# Altium PCB Proximity Sensor.PcbDoc
Units mil, origin at the board's own origin, x right, y up, seen from the top; angles counter-clockwise.
Board outline 1926.34 x 1473.4 mil, 2 copper layers (Top Layer, Bottom Layer); 26 components, 0 nets, 72 pads, 27 vias.
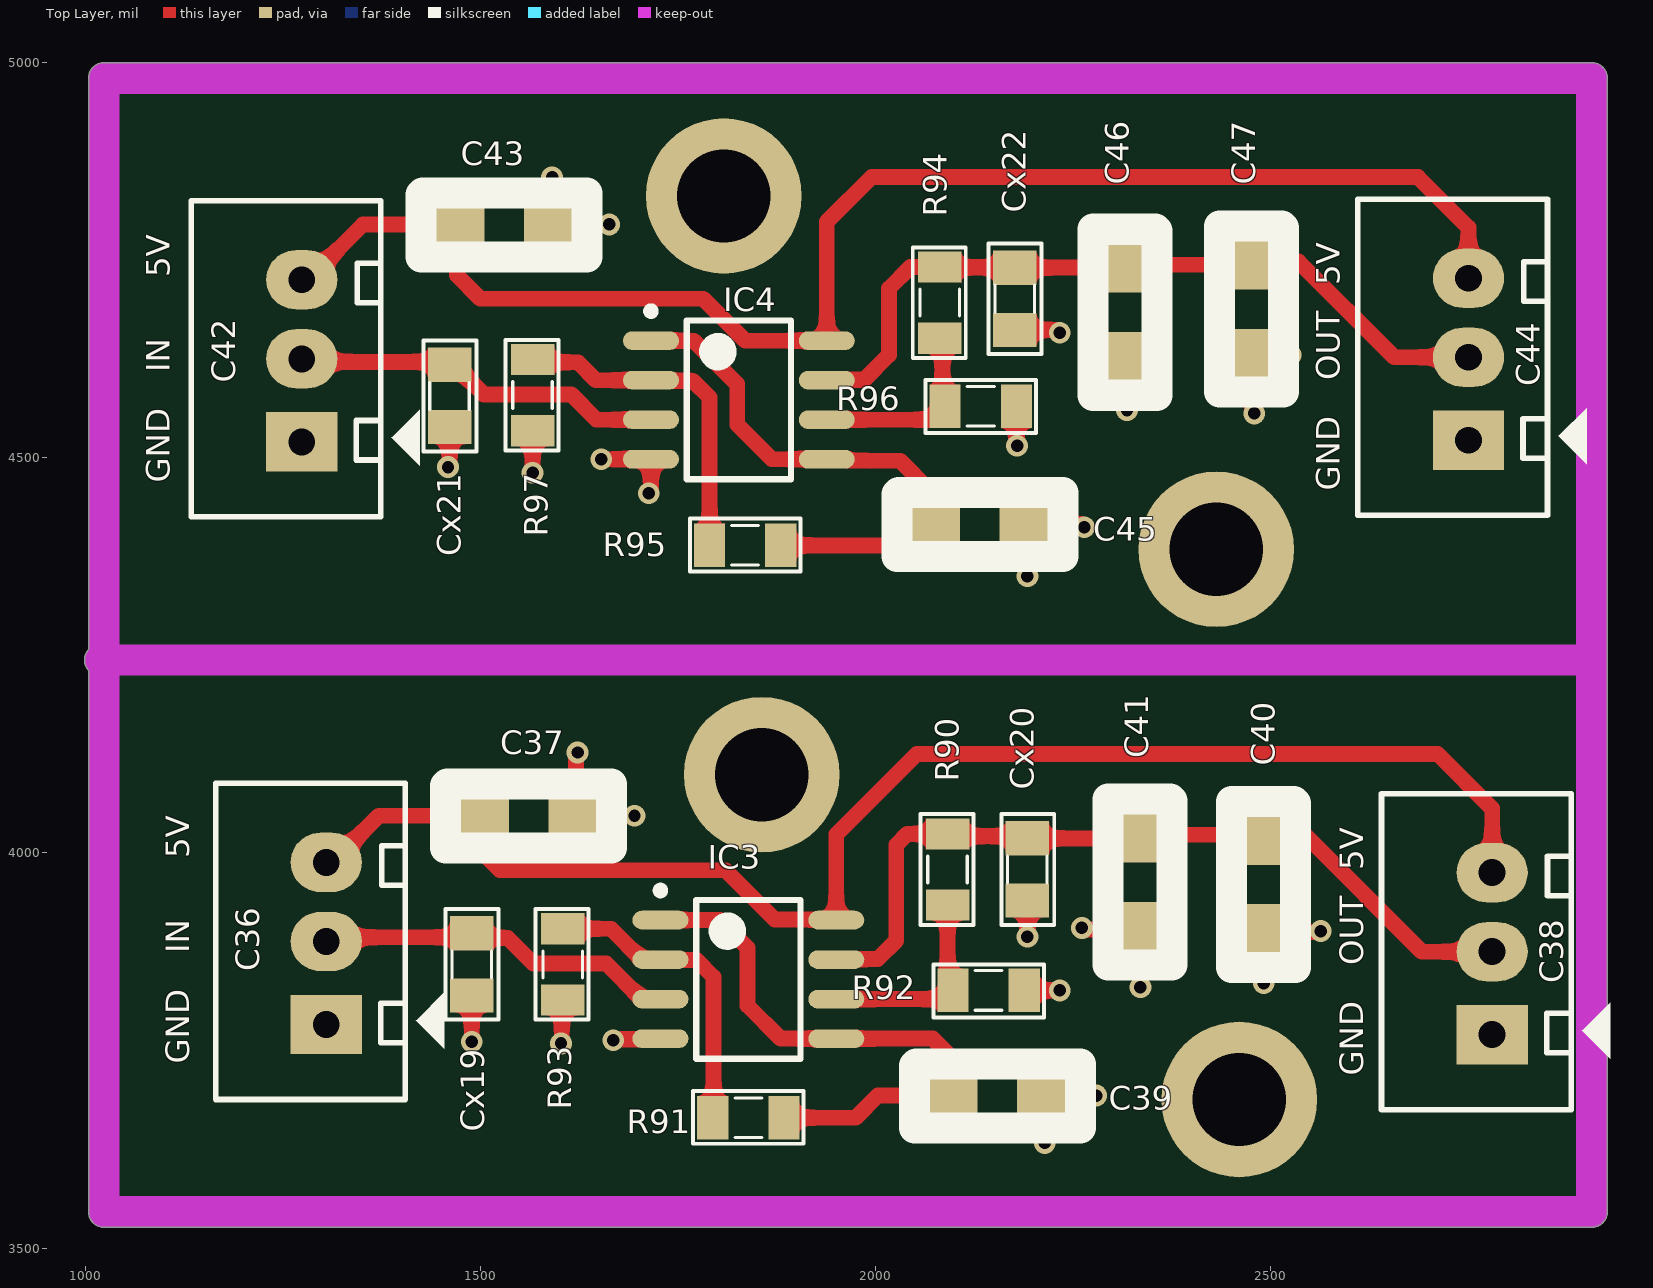
[diagram p0: Top Layer view]
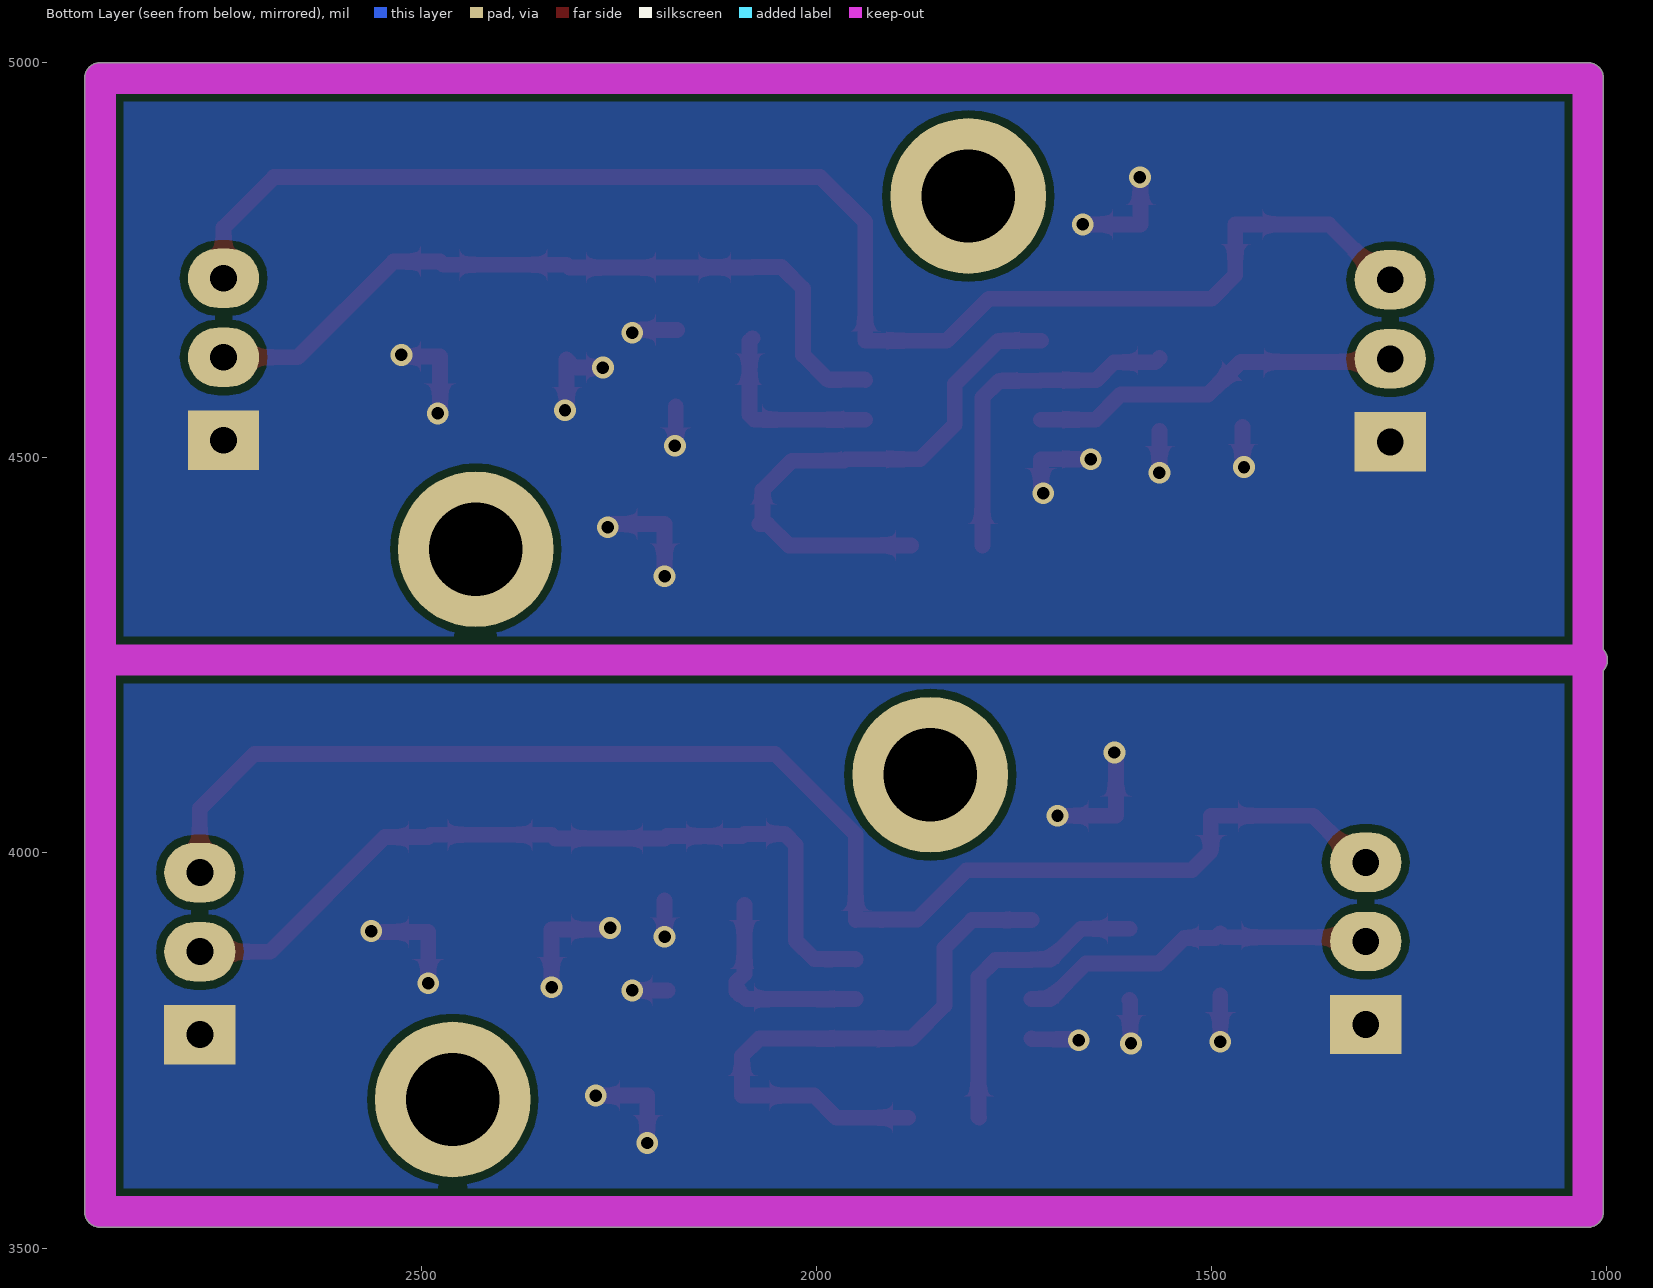
[diagram p1: Bottom Layer view, seen from below]

## Layer stack, top to bottom
Top Solder: solder mask 0.4, Solder Resist, Dk 3.5
Top Layer: signal copper 1.4
Dielectric 1: dielectric 12.6, FR-4, Dk 4.8
Bottom Layer: signal copper 1.4
Bottom Solder: solder mask 0.4, Solder Resist, Dk 3.5

## Board outline
1004.3,3546 1004.3,4230.89 cw(c1019,4244) 1004.3,4257.11 1004.3,4980 cw(c1024,4980) 1024,4999.7 2906,4999.7 cw(c2906,4980) 2925.7,4980 2925.7,3546 cw(c2906,3546) 2906,3526.3 1024,3526.3 cw(c1024,3546)

## Design rules (kind name [scope] priority, off if disabled: settings)
Clearance [All] p1: gap=10 ignorepadtopadclearanceinfootprint=FALSE
PlaneConnect [All] p1: planeconnectstyle=Direct reliefexpansion=20 reliefentries=4 reliefconductorwidth=10 reliefairgap=10
PolygonConnect [All] p1: connectstyle=Direct reliefconductorwidth=10 reliefentries=4 polygonreliefangle="90 Angle" airgapwidth=10
RoutingVias [All] p1: holewidth=15.75 width=27.56 viastyle="Through Hole" minholewidth=15.75 minwidth=27.56 maxholewidth=15.75 maxwidth=27.56
SolderMaskExpansion [All] p1: expansion=4 istentingtop=FALSE
Width [All] p1: maxlimit=30 minlimit=10 preferedwidth=20
29 further rules are at their usual default settings.

## Components (designator, comment, footprint, x,y, rotation, side; value= is the part's Value field where it differs from the comment)
C36 "Header3" Header3 1305,3788 r90 top
C37 "10uF/16V" TANTALUM-3216 1501,4047 r0 top
C38 "Header3" Header3 2780,3775 r90 top
C39 "10uF/16V" TANTALUM-3216 2094,3693 r0 top
C40 "10uF/16V" TANTALUM-3216 2491,4020 r270 top
C41 "10uF/16V" TANTALUM-3216 2335,4023 r270 top
C42 "Header3" Header3 1274,4525 r90 top
C43 "10uF/16V" TANTALUM-3216 1470,4795 r0 top
C44 "Header3" Header3 2750,4527 r90 top
C45 "10uF/16V" TANTALUM-3216 2072,4416 r0 top
C46 "10uF/16V" TANTALUM-3216 2316,4744 r270 top
C47 "10uF/16V" TANTALUM-3216 2476,4748 r270 top
Cx19 "104" CN-SMD-0805 1489,3859 r90 top value=33pF
Cx20 "104" CN-SMD-0805 2192,3979 r90 top value=33pF
Cx21 "104" CN-SMD-0805 1461,4578 r90 top value=33pF
Cx22 "104" CN-SMD-0805 2176,4701 r90 top value=33pF
IC3 "LM358" SO8 1839,3840 r0 top
IC4 "LM358" SO8 1827,4573 r0 top
R90 "100k" RES-SMD-0805 2091,3979 r270 top
R91 "100k" RES-SMD-0805 1839,3665 r180 top
R92 "10k" RES-SMD-0805 2143,3826 r0 top
R93 "10k" RES-SMD-0805 1604,3859 r270 top
R94 "100k" RES-SMD-0805 2081,4696 r270 top
R95 "100k" RES-SMD-0805 1835,4389 r180 top
R96 "10k" RES-SMD-0805 2133,4565 r0 top
R97 "10k" RES-SMD-0805 1566,4579 r270 top

## Footprints (in the part's own frame and the unit in brackets; to place one, negate y for a bottom-side part, rotate by r counter-clockwise, add the part's x,y. Pads: shape width x height; smd on the part's side, far side on the other; paste and mask are expansions set on the pad)
CN-SMD-0805 [mil]
  rect 43.31x55 smd paste+0 mask-55: 1(-39.36,0.01) 2(39.37,0.01)
  silkscreen extent -70,-34 70,33, body extent -39,-25 39,25, height 31
Header3 [mil] "CON 3"
  rect 75x90 hole 34 paste+0 mask-90: 1(-5,0)
  oval 75x90 hole 34 paste+0 mask-90: 2(100,0) 3(200,0)
  silkscreen extent -100,-150 300,140, body extent -95,-90 295,136, height 276
RES-SMD-0805 [mil]
  rect 39.37x55 smd paste+0 mask-55: 1(-45,0) 2(45,0)
  silkscreen extent -70,-34 70,33, body extent -39,-25 39,25, height 31
SO8 [mm] "SOIC, 8-Leads, Body 4.9x3.9mm, Pitch 1.27mm, IPC High Density"
  oval 1.8x0.6 smd paste+0 mask-1.8: 1(-2.825,1.905) 2(-2.825,0.635) 3(-2.825,-0.635) 4(-2.825,-1.905) 5(2.825,-1.905) 6(2.825,-0.635) 7(2.825,0.635) 8(2.825,1.905)
  silkscreen extent -2.95,-2.55 1.68,2.98, body extent -2.99,-2.45 3,2.45, height 1.6
TANTALUM-3216 [mm]
  rect 1.78x1.27 smd paste+0 mask-1.78: 1(0,0) 2(3.048,0)
  silkscreen extent -1.14,-1.04 4.19,1.02, body extent -0.18,-0.91 3.22,0.89, height 1.79

## Part data
C36 C38 C42 C44: "Header IDC, 3 x 1 Pin Vertical 2.54mm Pitch (Non-Boxed, Male)", Manufacturer="W¨¹rth Elektronik eiSos GmbH", partNo=613002143121, ComponentLink1 Description=Manufacturer, ComponentLink1URL=http://www.we-online.com, ComponentLink2 Description=Datasheet, ComponentLink2URL=http://katalog.we-online.de/em/datasheet/6130xx143121.pdf, Created by="Karrer Zheng", Created Date="29 March 2013", NoPins=02
C37 C39 C40 C41 C43 C45 C46 C47: library part CN-TANTALUM-SMD
Cx19 Cx20 Cx21 Cx22: library part CN
IC3 IC4: "Low-Power Dual Operational Amplifier"
R90 R91 R92 R93 R94 R95 R96 R97: library part Res-SMD, "Resistor", Manufacturer="Generic Components", Class=Passive, Published=08/06/2000, Publisher="Altium Hobart Technology Centre"

## Free pads (board coordinates)
  round 196.85 hole 118.11 paste+0 mask+0: 2(1808,4831) 2(1856,4099) 2(2431,4384) 2(2460,3688)

## Via types
v1: diameter 27.56, hole 15.75, Top Layer to Bottom Layer, 27 vias

## Nets (pads, with @x,y where several pads share a name; then routed paths per layer and width w, separated by ;. In a path a pad name is that pad's centre, name@x,y a point inside that pad or via, vN(x,y) a via of type N, cw(c..) or ccw(c..) an arc to the next point about the centre after c; other vN are vias at no path point)
pads on no net: C36.1 C36.2 C36.3 C37.1 C37.2 C38.1 C38.2 C38.3 C39.1 C39.2 C40.1 C40.2 C41.1 C41.2 C42.1 C42.2 C42.3 C43.1 C43.2 C44.1 C44.2 C44.3 C45.1 C45.2 C46.1 C46.2 C47.1 C47.2 Cx19.1 Cx19.2 Cx20.1 Cx20.2 Cx21.1 Cx21.2 Cx22.1 Cx22.2 IC3.1 IC3.2 IC3.3 IC3.4 IC3.5 IC3.6 IC3.7 IC3.8 IC4.1 IC4.2 IC4.3 IC4.4 IC4.5 IC4.6 IC4.7 IC4.8 R90.1 R90.2 R91.1 R91.2 R92.1 R92.2 R93.1 R93.2 R94.1 R94.2 R95.1 R95.2 R96.1 R96.2 R97.1 R97.2
copper on no net: | length 11116.5
  Top Layer w20: 1274,4625 1277.81,4621.19 1463.03,4621.19 1504.21,4580 1615,4580 1647,4548 1715.78,4548 ; 1274,4725 1281.5,4725 1351.5,4795 1470,4795 1470,4731 1500,4701 1782,4701 1835,4648 1938.22,4648 1938.22,4798.22 1995,4855 2686,4855 2750,4791 2750,4727 ; 1305,3888 1310.19,3893.19 1483.81,3893.19 1488.99,3898.37 1494.97,3892.4 1534.6,3892.4 1567,3860 1659.16,3860 1704.16,3815 1727.78,3815 ; 1305,3988 1312.5,3988 1371.5,4047 1501,4047 1501,4002 1525,3978 1810,3978 1872.31,3915.69 1949.53,3915.69 1950.22,3915 1950.22,4023.22 2052,4125 2711,4125 2780,4056 2780,3975 ; v1(1459,4488) 1460.99,4489.99 1460.99,4538.64 ; v1(1489,3761) 1488.99,3819.64 ; v1(1566,4481) 1566,4534 ; 1566,4626 1571.35,4620.65 1623.5,4620.65 1646.15,4598 1715.78,4598 1716.47,4597.31 1768.69,4597.31 1790,4576 1790,4389 ; v1(1590.75,4854.75) 1590,4854 1590,4795 v1(1663,4795) ; v1(1602,3759) 1603,3760 1603,3813 1604,3814 ; 1604,3904 1665.16,3904 1704.16,3865 1727.78,3865 1728.47,3864.31 1773.69,3864.31 1795,3843 1795,3666 1794,3665 ; v1(1623,4127) 1621,4125 1621,4047 v1(1695,4047) ; v1(1653,4498) 1715.78,4498 1715.78,4457.78 v1(1713,4455) ; v1(1668,3763) 1669.31,3764.31 1727.09,3764.31 1727.78,3765 ; 1715.78,4648 1770,4648 1825,4593 1825,4542 1869,4498 1938.22,4498 1962.82,4498 1964.82,4496 2031,4496 2068,4459 2068,4420 2072,4416 2061.96,4416 2034.96,4389 1880,4389 ; 1727.78,3915 1803,3915 1838,3880 1838,3807 1880,3765 1950.22,3765 2072.24,3765 2094,3743.24 2094,3693 2002.82,3693 1974.82,3665 1884,3665 ; 1938.22,4548 2078.31,4548 2084.5,4554.19 2084.5,4647.5 2081,4651 ; 1938.22,4598 1938.91,4598.69 1985.69,4598.69 2017,4630 2017,4714 2044,4741 2081,4741 2081.31,4740.69 2175.68,4740.69 2175.99,4740.37 2312.37,4740.37 2316,4744 2472,4744 2476,4748 2535,4748 2656,4627 2750,4627 ; 1950.22,3815 2088.31,3815 2098,3824.69 2098,3826 ; 1950.22,3865 1950.91,3865.69 2002.69,3865.69 2026,3889 2026,4010 2040,4024 2091,4024 2093.81,4021.19 2189.18,4021.19 2191.99,4018.37 2330.37,4018.37 2335,4023 2488,4023 2491,4020 2546,4020 2691,3875 2780,3875 ; 2091,3934 2091,3846.81 2101,3836.81 2101,3829 2101,3824.69 2097.31,3821 ; 2175.99,4661.64 2229.36,4661.64 v1(2233,4658) ; 2178,4565 2178,4516 v1(2179,4515) ; 2188,3826 v1(2233,3826) ; v1(2192,3894) 2191.99,3939.64 ; v1(2192,4350) 2192,4416 2260,4416 v1(2264,4412) ; v1(2214,3633) 2214,3693 v1(2279,3693) ; v1(2261,3905) 2263,3903 2335,3903 v1(2335,3830) ; v1(2270,4614) 2306,4614 2316,4624 2316,4562 v1(2318,4560) ; v1(2479,4556) 2476,4559 2476,4628 2523,4628 v1(2525,4630) ; v1(2491,3835) 2491,3900 2562,3900 v1(2563,3901)

## Polygon pours and split planes (outlines as drawn)
no net on Bottom Layer "NONET_L02_P001" (solid, remove dead copper, pour order 1): 1044,4224 2886,4224 2886,3566 1044,3566
no net on Bottom Layer "NONET_L02_P000" (solid, remove dead copper, pour order 0): 1044,4960 2886,4960 2886,4264 1044.34,4264 1044.22,4264.12

## Keep-outs
Keep-Out Layer:
  lines w39.37: 1019,4244 2906,4244 ; 2906,4244 2906,3546 1024,3546 1024,4980 2906,4980 2906,4972 2906,4244

## Silkscreen, mask and mechanical layers (free items; w line width, h text height)
Top Overlay:
  text "5V" at 1107,4728 h30 r90
  text "5V" at 2587,4718 h30 r90
  text "IN" at 1107,4608 h30 r90
  text "OUT" at 2587,4598 h30 r90
  text "GND" at 1107,4468 h30 r90
  text "GND" at 2587,4458 h30 r90
  text "5V" at 1132,3993 h30 r90
  text "5V" at 2617,3978 h30 r90
  text "IN" at 1132,3873 h30 r90
  text "OUT" at 2617,3858 h30 r90
  text "GND" at 1132,3733 h30 r90
  text "GND" at 2617,3718 h30 r90